# Altium PCB BoostCon_Control_Board_PCB.PcbDoc
Units mil, origin at the board's own origin, x right, y up, seen from the top; angles counter-clockwise.
Board outline 4715 x 2475 mil, 2 copper layers (Top Layer, Bottom Layer); 62 components, 47 nets, 232 pads, 12 vias.
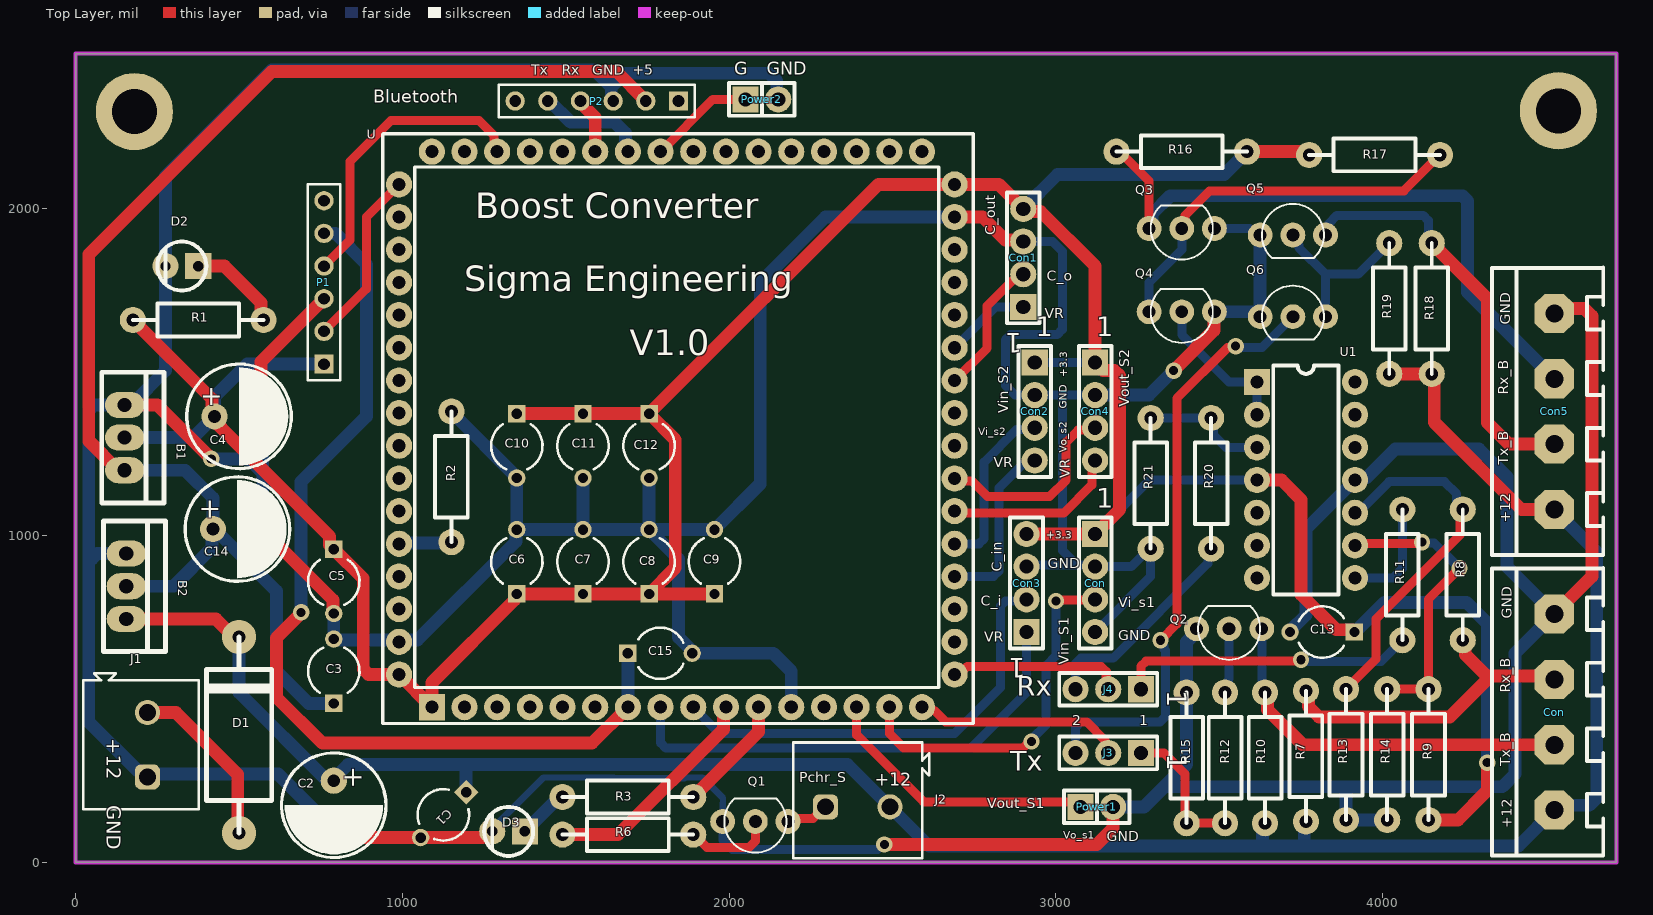
[diagram p0: Top Layer view]
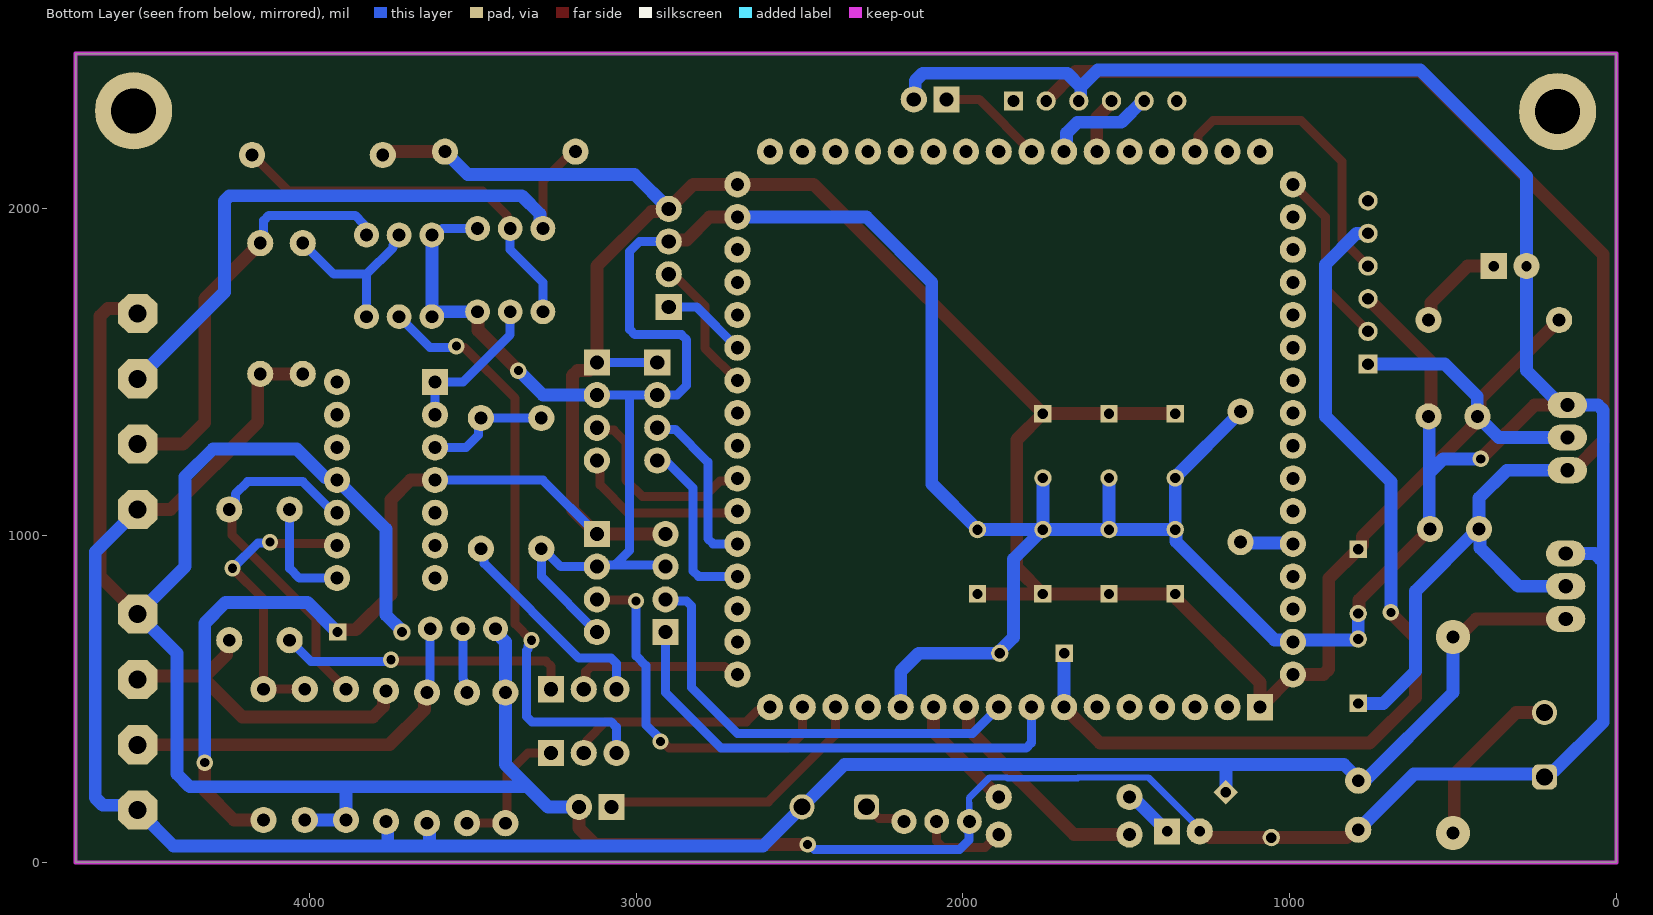
[diagram p1: Bottom Layer view, seen from below]

## Layer stack, top to bottom
Top Solder: solder mask 0.4, Solder Resist, Dk 3.5
Top Layer: signal copper 1.4
Dielectric 1: dielectric 12.6, FR-4, Dk 4.8
Bottom Layer: signal copper 1.4
Bottom Solder: solder mask 0.4, Solder Resist, Dk 3.5

## Board outline
0,0 4715,0 4715,2475 0,2475

## Design rules (kind name [scope] priority, off if disabled: settings)
Clearance [All] p1: gap=10 ignorepadtopadclearanceinfootprint=FALSE except(0: Arc-Hole Track-Hole SMDPad-Hole THPad-Hole Via-Hole Fill-Hole Poly-Hole Region-Hole Text-Hole)
HoleSize [All] p1: absolutevalues=TRUE maxlimit=393.7 minlimit=1 maxpercent=80.000 minpercent=20.000
PolygonConnect [All] p1: connectstyle=Relief reliefconductorwidth=10 reliefentries=4 polygonreliefangle="90 Angle" airgapwidth=10
RoutingVias [All] p1: holewidth=28 width=50 viastyle="Through Hole" minholewidth=28 minwidth=50 maxholewidth=28 maxwidth=50
SilkToSilkClearance [All] p1: silktosilkclearance=0
SilkToSolderMaskClearance [IsPad] p1: minsilkscreentomaskgap=0 clearancetoexposedcopper=TRUE
SolderMaskExpansion [All] p1: expansion=4 istentingtop=FALSE
Width [All] p1: maxlimit=39.37 minlimit=19.68 preferedwidth=27.56
27 further rules are at their usual default settings.

## Components (designator, comment, footprint, x,y, rotation, side; value= is the part's Value field where it differs from the comment)
B1 "AMS1117" 78MXX2 150,1400 r270 top
B2 "AMS1117" 78MXX2 155,945 r270 top
C1 "Cap2" CAPR5-4X5 1125.4,145.4 r225 top value=100nF
C2 "CAP_p" CAP-1.5 790,250 r270 top value=100uf
C3 "Cap2" CAPR5-4X5 790,585 r90 top value=100nF
C4 "CAP_p" CAP-1.5 425,1365 r0 top value=100uf
C5 "Cap2" CAPR5-4X5 790,860 r270 top value=100nF
C6 "Cap2" CAPR5-4X5 1350,920 r90 top value=100nF
C7 "Cap2" CAPR5-4X5 1552.5,920 r90 top value=100nF
C8 "Cap2" CAPR5-4X5 1755,920 r90 top value=100nF
C9 "Cap2" CAPR5-4X5 1955,920 r90 top value=100nF
C10 "Cap2" CAPR5-4X5 1350,1275 r270 top value=100nF
C11 "Cap2" CAPR5-4X5 1552.5,1275 r270 top value=100nF
C12 "Cap2" CAPR5-4X5 1755,1275 r270 top value=100nF
C13 "Cap2" CAPR5-4X5 3815,705 r180 top value=100nF
C14 "CAP_p" CAP-1.5 420,1020 r0 top value=100uf
C15 "Cap2" CAPR5-4X5 1788.43,640 r0 top value=100nF
Con "CON4" TB4 4525,160 r90 top
Con "CON4" SIP4 3120,1005 r270 top
Con1 "CON4" SIP4 2900,1700 r90 top
Con2 "CON4" SIP4 2935,1530 r270 top
Con3 "CON4" SIP4 2910,705 r90 top
Con4 "CON4" SIP4 3120,1530 r270 top
Con5 "CON4" TB4 4525,1080 r90 top
D1 "Diode" DO-201AD 500,90 r90 top
D2 "LED_Red" LED3 375,1825 r180 top
D3 "LED_Red" LED3 1375,95 r180 top
J1 "691111710002" 691134710002 200,360 r90 top
J2 "691111710002" 691134710002 2393.43,189.69 r0 top
J3 "C_AUX" SIP3 3260,335 r180 top
J4 "C_AUX" SIP3 3260,530 r180 top
P1 "Header 6" HDR1X6 760,1525 r90 top
P2 "Header 6" HDR1X6 1845,2330 r180 top
Power1 "Plugable_2Pin" SIP2 3075,170 r0 top
Power2 "Plugable_2Pin" SIP2 2050,2335 r0 top
Q1 "BC517" TO92-bc517 2080,125 r180 top
Q2 "BC517" TO92-bc517 3530,715 r180 top
Q3 "2N7000" TO92 3385,1940 r180 top
Q4 "2N7000" TO92 3385,1685 r180 top
Q5 "2N7000" TO92 3725,1920 r0 top
Q6 "2N7000" TO92 3725,1670 r0 top
R1 "RES_s" R3 175,1660 r0 top
R2 "RES_s" R3 1150,980 r90 top
R3 "RES_s" R3 1890,200 r180 top
R6 "RES_s" R3 1490,85 r0 top
R7 "RES_s" R3 3765,125 r90 top
R8 "RES_s" R3 4245,1080 r270 top
R9 "RES_s" R3 4140,530 r270 top
R10 "RES_s" R3 3640,520 r270 top
R11 "RES_s" R3 4060,1080 r270 top
R12 "RES_s" R3 3517.5,120 r90 top
R13 "RES_s" R3 3887.5,130 r90 top
R14 "RES_s" R3 4013.75,130 r90 top
R15 "RES_s" R3 3400,120 r90 top
R16 "RES_s" R3 3185,2175 r0 top
R17 "RES_s" R3 4175,2165 r180 top
R18 "RES_s" R3 4150,1895 r270 top
R19 "RES_s" R3 4020,1895 r270 top
R20 "RES_s" R3 3475,960 r90 top
R21 "RES_s" R3 3290,960 r90 top
U "STM32F030R8T6" "LQFP64_M - CONVERTER" 1840,1325 r90 top
U1 "MCP6004" DIP14 3615,1470 r0 top

## Footprints (in the part's own frame and the unit in brackets; to place one, negate y for a bottom-side part, rotate by r counter-clockwise, add the part's x,y. Pads: shape width x height; smd on the part's side, far side on the other; paste and mask are expansions set on the pad)
78MXX2 [mil]
  oval 80x120 hole 43.31: 1(0,0) 2(100,0) 3(200,0)
  silkscreen extent -100,-70 300,120, body extent -109,-70 311,115, height 738
691134710002 [mm] "Serie 1347 - 5.00 mm_2 pins"
  rrect50% 1.95x1.95 hole 1.3: 1(-2.5,-0.5)
  round 1.95 hole 1.3: 2(2.5,-0.5)
  silkscreen extent -5,-4.5 5.55,4.5, body extent -5,-4.5 5.55,4.5, height 13.1
CAP-1.5 [mil]
  round 80 hole 39.37: 1(0,0) 2(150,0)
  silkscreen extent -85,-160 235,160, body extent -93,-167 241,167, height 551
CAPR5-4X5 [mm] "Capacitor; 2 Leads"
  rect 1.35x1.35 hole 0.8: 1(-2.5,0)
  round 1.35 hole 0.8: 2(2.5,0)
  silkscreen extent -1.69,-2 1.82,2
DIP14 [mil]
  rect 80x80 hole 40: 1(0,0)
  round 80 hole 40: 2(0,-100) 3(0,-200) 4(0,-300) 5(0,-400) 6(0,-500) 7(0,-600) 8(300,-600) 9(300,-500) 10(300,-400) 11(300,-300) 12(300,-200) 13(300,-100) 14(300,0)
  silkscreen extent 50,-650 250,50, body extent 1,-674 311,76, height 210
DO-201AD [mil]
  round 105 hole 40: A(0,0) K(600,0)
  silkscreen extent 0,-100 600,100, body extent -26,-110 626,110, height 220
HDR1X6 [mm] "Connector; Header; 6 Position"
  rect 1.5x1.5 hole 0.9: 1(0,0)
  round 1.5 hole 0.9: 2(2.54,0) 3(5.08,0) 4(7.62,0) 5(10.16,0) 6(12.7,0)
  silkscreen extent -1.27,-1.27 13.97,1.27
LED3 [mil]
  rect 80x80 hole 32: A(0,0)
  round 80 hole 32: K(100,0)
  silkscreen extent -25,-75 125,75, body extent -26,-76 110,76, height 209
"LQFP64_M - CONVERTER" [mil] "Arm_Converter"
  rect 80x80 hole 40: 1(-850,750)
  round 80 hole 40: 2(-850,650) 3(-850,550) 4(-850,450) 5(-850,350) 6(-850,250) 7(-850,150) 8(-850,50) 9(-850,-50) 10(-850,-150) 11(-850,-250) 12(-850,-350) 13(-850,-450) 14(-850,-550) 15(-850,-650) 16(-850,-750) 17(-750,-850) 18(-650,-850) 19(-550,-850) 20(-450,-850) 21(-350,-850) 22(-250,-850) 23(-150,-850) 24(-50,-850) 25(50,-850) 26(150,-850) 27(250,-850) 28(350,-850) 29(450,-850) 30(550,-850) 31(650,-850) 32(750,-850) 33(850,-750) 34(850,-650) 35(850,-550) 36(850,-450) 37(850,-350) 38(850,-250) 39(850,-150) 40(850,-50) 41(850,50) 42(850,150) 43(850,250) 44(850,350) 45(850,450) 46(850,550) 47(850,650) 48(850,750) 49(750,850) 50(650,850) 51(550,850) 52(450,850) 53(350,850) 54(250,850) 55(150,850) 56(50,850) 57(-50,850) 58(-150,850) 59(-250,850) 60(-350,850) 61(-450,850) 62(-550,850) 63(-650,850) 64(-750,850)
  silkscreen extent -900,-907 905,900, body extent -895,-905 905,905, height 334
R3 [mil]
  round 80 hole 39.37: 1(0,0) 2(400,0)
  silkscreen extent 0,-50 400,50, body extent -11,-50 411,52, height 185
SIP2 [mil]
  rect 80x80 hole 43.31: 1(0,0)
  round 80 hole 43.31: 2(100,0)
  silkscreen extent -50,-50 150,50, body extent -50,-45 150,55, height 334
SIP3 [mil]
  rect 80x80 hole 43.31: 1(0,0)
  round 80 hole 43.31: 2(100,0) 3(200,0)
  silkscreen extent -50,-50 250,50, body extent -50,-45 250,55, height 334
SIP4 [mil]
  rect 80x80 hole 43.31: 1(0,0)
  round 80 hole 43.31: 2(100,0) 3(200,0) 4(300,0)
  silkscreen extent -50,-50 350,50, body extent -50,-45 350,55, height 334
TB4 [mil] "Terminal Block Straight"
  oct 120x120 hole 55.12: 1(0,0) 2(200,0) 3(400,0) 4(600,0)
  silkscreen extent -139,-150 740,191, body extent -132,-397 734,75, height 337
TO92 [mil]
  round 76 hole 39.37: 1(100,0) 2(0,0) 3(-100,0)
  silkscreen extent -95,-70 95,95, body extent -95,-52 95,93, height 210
TO92-bc517 [mil]
  round 76 hole 39.37: 1(-100,0) 2(0,0) 3(100,0)
  silkscreen extent -95,-70 95,95, body extent -95,-52 95,93, height 210

## Part data
B1 B2: "1117", Manufacturer_Name="Advanced Monolithic Systems", Datasheet Link=https://datasheet.lcsc.com/szlcsc/Advanced-Monolithic-Systems-AMS-AMS1117-ADJ_C6188.pdf, Geometry.Height=1.8mm, Manufacturer_Part_Number=AMS1117
C1 C3 C5 C6 C7 C8 C9 C10 C11 C12 C13 C15: "Capacitor", PackageDescription="Capacitor; 2 Leads", PackageReference=CAPR5-4X5, Published=23-Sep-2002, Publisher="Altium Limited"
C2 C4 C14: library part CAP-DC
Con Con Con1 Con2 Con3 Con4 Con5: "4Pin_pinHeader", DPM/VM/AM="DPM, VM, AM", SMD/TH=TH
D2 D3: library part LED, "Led_Red_1206", DPM/VM/AM="DPM, VM, AM", SMD/TH=SMD
J1 J2: "WR-TBL Series 111 Horizontal Entry Modular, THT, pitch 5mm, 2p", Manufacturer="Wurth Elektronik", Operating Temperature Max=105°C, Operating Temperature Min=-40°C, Rated Current=15A, Working Voltage=250V, Application="Pressure Clamp", Category="Terminal Blocks", ComponentLink1Description="Website Link", ComponentLink1URL=https://www.we-online.com/redexpert/article/691111710002?ad, ComponentLink2Description="Datasheet Link", ComponentLink2URL=https://www.we-online.com/redexpert/spec/691111710002?ad, Manufacturer Part Number=691111710002, Match Code=WR-TBL, Modularity=Yes, Mount="Through Hole", Number of Pins=2, Number of Rows=1, Orientation=Horizontal, Packaging=Box, Pitch=5mm
J3 J4: library part CON3, "Connector", Note=SC, SMD/TH=TH
P1 P2: "Header, 6-Pin", LatestRevisionDate=17-Jul-2002, LatestRevisionNote="Re-released for DXP Platform.", Publisher="Altium Limited"
Power1 Power2: library part CON2, "Connector", SMD/TH=TH
Q1 Q2: "Bipolar _BJT_ Transistor NPN - Darlington 30V 1A 200MHz 625mW Through Hole TO-92-3", Package="TO-92 NXP Semiconductors", Availability=Unavailable, MF=ON, MP=BC517, Price=None, SnapEDA_Link=https://www.snapeda.com/parts/BC517/ON%20Semiconductor/view-part/703680/?ref=snap
Q3 Q4 Q5 Q6: "N-Channel 60 V 350mA (Tc) 1W (Tc) Through Hole TO-92-3", Package="E-PKG AXIAL-LEADED-2 ON Semiconductor", Check_prices=https://www.snapeda.com/parts/2N7000/STMicroelectronics/view-part/?ref=eda, MF=STMicroelectronics, MP=2N7000, SnapEDA_Link=https://www.snapeda.com/parts/2N7000/STMicroelectronics/view-part/?ref=snap
R1 R2 R3 R6 R7 R8 R9 R10 R11 R12 R13 R14 R15 R16 R17 R18 R19 R20 R21: library part RES
U: "ARMÂ® CortexÂ®-M0 STM32F0 Microcontroller IC 32-Bit 48MHz 64KB _64K x 8_ FLASH", Package="LQFP-64 STMicroelectronics", Availability=Unavailable, MF=STMicroelectronics, MP=STM32F030R8T6, Price=None, SnapEDA_Link=https://www.snapeda.com/parts/STM32F030R8T6/STMicroelectronics/view-part/312109/?ref=snap
U1: "Low Power Quad Operational Amplifier", Note=SC, SMD/TH=SMD
D1: SMD/TH=SMD

## Free pads (board coordinates)
  round 236.22 hole 137.8: 2(180,2297.83) 2(4537.83,2300)

## Via types
v1: diameter 50, hole 28, Top Layer to Bottom Layer, 12 vias

## Nets (pads, with @x,y where several pads share a name; then routed paths per layer and width w, separated by ;. In a path a pad name is that pad's centre, name@x,y a point inside that pad or via, vN(x,y) a via of type N, cw(c..) or ccw(c..) an arc to the next point about the centre after c; other vN are vias at no path point)
+3.3: B1.2 C4.1 C5.1 C6.1 C7.1 C8.1 C9.1 C10.1 C11.1 C12.1 C13.1 Con1.4 Con2.1 Con3.4 Con4.1 Con.1@3120,1005 P1.1 R1.1 R9.2 R16.2 R17.2 U1.4 U.1 U.32 U.64 | length 10851
  Top Layer w39.37: R1.1 417.23,1417.77 417.23,1372.77 C4.1 425,1350.81 447.46,1328.35 447.46,1327.54 777.2,997.8 777.2,971.22 C5.1 880,868.43 880,591.14 896.14,575 U.64 U.1 1090.99,475.99 1090.99,550.99 1343.11,803.11 1343.11,814.69 C6.1 C7.1 C8.1 ; C10.1 C11.1 C12.1 ; C9.1 C8.1 ; Con3.4@2935,1005 3120,1005 3195,1080 3195,1489.37 3178.86,1505.51 3144.49,1505.51 Con4.1 3120,1825 2952.77,1992.23 2907.77,1992.23 Con1.4 2825,2075 U.32 2456.57,2075 C12.1 ; R16.2 3754.01,2175 3764.01,2165 R17.2 ; U1.4 3690,1170 3750,1110 3750,820 3858.11,711.89 3894.43,711.89 3906.54,711.89 C13.1 ; R9.2 4230,130 4320,220 v1(4320,305.31) ; C8.1 1835,901.58 1835,1293.43 C12.1
  Bottom Layer w27.56: Con2.1 Con4.1 ; Con.1@3120,1005 3285,1170 U1.4
  Bottom Layer w39.37: B1.2 360,1300 C4.1 425.67,1365.67 425.67,1425.67 525,1525 P1.1 ; Con1.4 3005,2105 3515,2105 R16.2 ; C13.1@3911.13,701.13 3911.13,702.7 C13.1 3920.31,711.89 3921.89,711.89 4005,795 4256.94,795 4320,731.94 v1(4320,305.31)
+5: B1.3 B2.2 C3.1 C14.1 P2.2 | length 4195.9
  Top Layer w39.37: B1.3 130,1200 40,1290 40,1860 600,2420 1655,2420 P2.2
  Bottom Layer w39.37: B1.3 335,1200 420,1115 C14.1 ; B2.2 300,845 417.54,962.54 417.54,1017.54 C14.1 ; C3.1 713.43,486.57 615,585 615,830 425,1020 C14.1
+12: B2.3 C1.1 C2.1 Con5.1 Con.1@4525,160 D1.K J2.2 R7.1 R10.2 R18.2 R19.2 | length 6909.7
  Top Layer w39.37: B2.3 429.04,745 484.04,690 D1.K@505,690 ; R19.2 R18.2 4157.77,1487.23 4157.77,1347.23 4425,1080 Con5.1
  Bottom Layer w39.37: D1.K 500,520 C2.1@770,250 ; C2.1 790,255.99 833.38,299.37 1200,299.37 ; C1.1 1195,294.37 1200,299.37 ; R10.2 3632.23,112.23 3632.23,52.54 3630,50.31 ; R7.1 3760,120 3760,50.31 ; Con5.1 4655,950 4655,198.06 4631.94,175 4540,175 4525,160 4415.31,50.31 3760,50.31 ; 1200,299.37 2362.48,299.37 2611.54,50.31 3630,50.31 ; 3630,50.31 3760,50.31
Boot0: R2.1 U.60 | length 162.1
  Bottom Layer w39.37: U.60 992.5,977.5 1147.5,977.5 R2.1
C_S_in: Con1.2 U.26 | length 420
  Top Layer w27.56: U.26 2789.14,1574.14 2789.14,1702.77 2886.37,1800 Con1.2
C_S_out: Con3.2 U.9 | length 1366.7
  Bottom Layer w27.56: U.9 1970,395 2690,395 2830,535 2830,783.9 2846.14,800.04 Con3.2@2910,800.04
FLASH: R3.1 U.11 | length 357.8
  Top Layer w39.37: R3.1 2090,400 U.11
GND: B1.1 B2.1 C1.2 C2.2 C3.2 C4.2 C5.2 C6.2 C7.2 C8.2 C9.2 C10.2 C11.2 C12.2 C13.2 C14.2 C15.2 Con1.3 Con2.2 Con3.3 Con4.2 Con5.4 Con.2@3120,905 Con.4 D2.K D3.K J1.1 P1.3 P2.3 Power1.2 Power2.2 Q1.3 Q2.3 Q3.3 Q4.3 Q5.3 Q6.3 R2.2 R13.1 R14.1 R15.2 R21.1 U1.11 U.12 U.31 U.63 | length 22731.8
  Top Layer w39.37: B1.1@125,1400 B1.1 250,1400 v1(415,1235) ; C14.2 787.36,802.64 787.36,764.21 C5.2 ; C4.2 567.23,1372.77 567.23,1532.23 P1.3 ; C2.2 800.99,100 825.19,75.81 C1.2 1244.81,75.81 1264.01,95 D3.K ; v1(2475,55) 3125,55 3175,105 Power1.2 ; U.31 2775,1975 2845.04,1904.96 2895.04,1904.96 Con1.3 ; v1@3362.03,1507.03 3483.24,1628.24 3483.24,1683.24 Q4.3 ; Con.4@4525,760 4640,875 4640,1671.94 4616.94,1695 4540,1695 Con5.4
  Bottom Layer w19.68: D3.K@1296.94,125 1431.78,259.84 1646.64,259.84 1648.5,257.98 1863.35,257.98 1865.21,259.84 1918.27,259.84 1981.07,197.04 1981.07,180.74 1980.73,180.4 1980.73,125.73 Q1.3 1981.04,123.96 1990.78,114.22 Q1.3@1990.78,96.21
  Bottom Layer w27.56: C14.2 C14.2@572.5,1022.5 ; C4.2@572.5,1362.5 C4.2 ; D3.K@1250.71,105.1 1260.81,95 D3.K ; Q1.3@1981.04,123.96 1981.04,68.96 2010,40 2453.93,40 2468.93,55 v1(2475,55) ; Con1.3 2990,1900 3020,1870 3020,1631.14 3003.86,1615 2861.14,1615 2845,1598.86 2845,1460 2875,1430 Con2.2 3020,1430 ; Con3.3 2914.96,909.96 Con.2@3115.04,909.96 ; 3062.29,912.71 3020,955 3020,1430 ; Con.2@3116.99,908.01 3120,905 3229.97,905 3284.97,960 R21.1 3290,875 Con.4@3120,705 ; Con4.2 3020,1430 ; Q3.3 3591.89,1940 3611.89,1920 Q5.3
  Bottom Layer w39.37: B2.1 66.14,945 50,928.86 40,938.86 ; v1(415,1235) 530,1235 572.5,1192.5 ; C14.2@572.5,1022.5 572.5,1192.5 ; C4.2@572.5,1362.5 572.5,1192.5 ; C2.2 620,270 228.11,270 J1.1 200.98,280.28 189.72,280.28 40,430 40,938.86 ; C5.2 C3.2 792.64,680.79 984.21,680.79 U.63 995.67,680.67 1045.67,680.67 1347.36,982.36 1347.36,1015.79 C6.2 ; R2.2 1150,1378.29 1350,1178.29 C10.2 C6.2 ; D3.K D3.K@1275,105.99 ; C11.2 C7.2 ; P2.3 1638.97,2336.03 1638.97,2373.19 ; C12.2 C8.2 ; Power2.2 2145.59,2339.41 2145.59,2391.94 2122.53,2415 1680.78,2415 1638.97,2373.19 ; U.12 2190,585 2135,640 C15.2 1886.85,643.73 1879.96,650.62 1879.96,653.81 1845,688.77 1845,928.43 C8.2 ; U.31 2295,1975 2095,1775 2095,1158.43 C9.2 C8.2 ; Con4.2 3285,1430 v1(3360,1505) ; Power1.2 3270,170 3331.36,231.36 ; Q2.3 3430,705.09 3400,675.09 R15.2 3400,300 3331.36,231.36 ; Q4.3 3600.09,1685 3615.09,1670 Q6.3 Q5.3 ; C13.2 3716.57,708.73 3765,757.15 3765,1020 U1.11 3922.77,1177.77 3951.15,1177.77 4038.38,1265 4295,1265 4380,1180 4380,905 4525,760 4405,640 4405,270.56 4368.58,234.14 ; 3887.5,227.42 R13.1 R14.1 ; 4365.79,231.36 3331.36,231.36 ; 40,938.86 40,1383.86 56.14,1400 B1.1 170,1400 275,1505 D2.K 275,2100 600,2425 1587.16,2425 1638.97,2373.19 ; C6.2 C7.2 ; C7.2 C8.2
NetD1_A: D1.A J1.2 | length 537.5
  Top Layer w39.37: J1.2 306.57,458.43 496.21,268.79 496.21,98.79 D1.A@505,90
NetD2_A: D2.A R1.2 | length 294.7
  Top Layer w39.37: D2.A 455,1825 567.23,1712.77 567.23,1667.77 R1.2
NetD3_A: D3.A R3.2 | length 172.6
  Bottom Layer w39.37: D3.A@1380,90 D3.A 1480,200 R3.2 R3.2@1485,195
NetQ1_2: Q1.2 R6.2 | length 274.9
  Top Layer w27.56: R6.2 1892.36,85 1932.36,45 2060,45 2080,65 Q1.2
NetQ2_2: Q2.2 R12.2 | length 200.2
  Bottom Layer w27.56: R12.2 3527.53,530.03 3527.53,559.9 3530,562.36 Q2.2
NetQ3_2: Q3.2 Q4.1 R17.1 | length 1197.2
  Top Layer w27.56: Q3.2 3394.27,1949.27 3394.27,1979.27 3470,2055 4065,2055 R17.1
  Bottom Layer w27.56: Q4.1 3285,1775 3385,1875 Q3.2
NetQ4_2: Q4.2 U1.1 U1.2 | length 460.1
  Bottom Layer w27.56: Q4.2 3385,1615 3530,1470 U1.1 U1.2
NetQ5_2: Q5.2 Q6.1 R19.1 | length 525.8
  Bottom Layer w27.56: Q5.2 3725,1906.89 3743.54,1888.35 3743.54,1881.46 3825,1800 ; Q6.1 3825,1800 ; R19.1 3925,1800 3825,1800
NetR8_1: R8.1 R13.2 U1.10 | length 1112.4
  Top Layer w27.56: R13.2 3980,622.5 3980,745 4236.25,1001.25 R8.1@4236.25,1080
  Bottom Layer w27.56: U1.10 3925,1070 4020,1165 4189.05,1165 4226.22,1127.83 4226.22,1090.03 R8.1@4236.25,1080
NetR9_1: R9.1 R14.2 U1.9 | length 892.9
  Top Layer w27.56: U1.9 3920.71,975.71 4115.71,975.71 v1(4120,980) ; R14.2 R9.1 4140,805 v1(4235,900)
  Bottom Layer w27.56: v1(4120,980) 4121.85,978.15 4156.85,978.15 v1(4235,900)
NetR11_1: R11.1 U1.8 | length 346.5
  Bottom Layer w27.56: U1.8 4030,870 4060,900 R11.1@4060,1089.07
NetR20_2: R20.2 R21.2 U1.3 | length 388.6
  Bottom Layer w27.56: R21.2 R20.2 3482.46,1352.54 3482.46,1307.54 3520,1270 U1.3
NRST: C15.1 P1.5 U.7 | length 2951.8
  Top Layer w39.37: v1(690,765) 690,762.12 615,687.12 615,505 755,365 1580,365 U.7
  Bottom Layer w39.37: v1(690,765) 690,1165 890,1365 890,1830 795,1925 P1.5 ; U.7 C15.1
PreChgRelay: R6.1 U.10 | length 696.7
  Top Layer w39.37: R6.1 1660,85 1982.23,407.23 1982.23,467.23 U.10
PreChgRelay_signal: J2.1 Q1.1 | length 154.1
  Top Layer w27.56: Q1.1 2189.27,134.27 2256.34,134.27 2292.07,170 J2.1 J2.1@2282.64,182.36
  Bottom Layer w27.56: J2.1@2292.07,170 J2.1
PWM_G: Power2.1 U.41 | length 326.3
  Top Layer w27.56: U.41 1950,2335 Power2.1
RX1: P2.4 U.43 | length 173.6
  Top Layer w39.37: P2.4 1545,2324.67 1590,2279.67 U.43
RX2_HV1: J4.1 R11.2 | length 916.4
  Top Layer w27.56: J4.1 3260,600.08 3276.14,616.22 3746.22,616.22 v1(3750,620)
  Bottom Layer w27.56: v1(3750,620) 3755,615 3995,615 R11.2@4066.44,686.44
RX2_HV2: J4.3 R20.1 | length 659.8
  Bottom Layer w27.56: J4.3 3060,608.86 3076.14,625 3175,625 3464.97,914.97 3464.97,949.97 R20.1
RX2_LV: J4.2 U.17 | length 537.4
  Top Layer w27.56: U.17 2704.19,575 2729.19,600 3137.8,600 3153.94,583.86 3153.94,536.06 J4.2
RX_BUS2: Con5.3 Q3.1 R16.1 | length 1979.5
  Top Layer w27.56: R16.1 3195,2175 3285,2085 Q3.1
  Bottom Layer w39.37: Q3.1 3294.27,1949.27 3294.27,1984.27 3350,2040 4243.86,2040 4260,2023.86 4260,1745 Con5.3
SWCLK: P1.2 U.49 | length 545.3
  Top Layer w27.56: P1.2 890,1755 890,1975 U.49
SWDIO: P1.4 U.46 | length 917.7
  Top Layer w27.56: P1.4 840,1905 840,2145 965,2270 1235,2270 1280.04,2224.96 1280.04,2184.96 U.46
SWO: P1.6
TX1: P2.5 U.42 | length 343
  Top Layer w27.56: P2.5@1445,2325 P2.5
  Bottom Layer w39.37: P2.5 1450.33,2330 1515.33,2265 1649.16,2265 1682.23,2231.94 1682.23,2182.77 U.42
TX2_HV1: J3.1 R12.1 R15.1 | length 429.4
  Top Layer w27.56: J3.1 3330,335 3395,270 R15.1@3395,120 ; R15.1 R12.1
TX2_HV2: J3.3 Q6.2 | length 1830.6
  Top Layer w27.56: v1(3320,680) 3370,730 3370,1420 3525.71,1575.71 3545.71,1575.71 v1(3550,1580)
  Bottom Layer w27.56: J3.3 3060,413.86 3076.14,430 3318.86,430 3335,446.14 3335,649.13 3331.22,652.91 3331.22,662.71 3320,673.93 v1(3320,680) ; v1(3550,1580) 3554.29,1575.71 3601.97,1575.71 3602.56,1575.12 3630.12,1575.12 Q6.2
TX2_LV: J3.2 U.16 | length 644.7
  Top Layer w27.56: U.16 2600.03,464.97 2627.4,464.97 2662.36,430 3093.58,430 3149.97,373.62 3149.97,345.03 J3.2
TX_BUS1: Con.2@4525,360 Q2.1 R10.1 | length 1176.8
  Top Layer w39.37: R10.1 3647.77,512.23 3647.77,467.23 3755,360 Con.2@4525,360
  Bottom Layer w27.56: Q2.1 3630,530 R10.1
TX_BUS2: Con5.2 Q5.1 R18.1 | length 1285.7
  Top Layer w39.37: R18.1 4320,1725 4320,1346.47 4386.47,1280 Con5.2
  Bottom Layer w27.56: Q5.1 3834.27,1929.27 3834.27,1954.27 3860,1980 4123.86,1980 4140,1963.86 4140,1905 R18.1
Vin_S_1: Con.3@3120,805 U.15 | length 1145.4
  Top Layer w27.56: U.15 2490,395 2535,350 2898.93,350 2918.93,370 v1(2925,370) ; v1(3000,800) 3002.5,802.5 3102.43,802.5 3109.97,794.97 3120,805 Con.3@3130,795
  Bottom Layer w27.56: v1(2925,370) 2925,376.07 2970,421.07 2970,601.97 3000,631.97 v1(3000,800)
Vin_S_2: Con2.3 U.21 | length 529
  Bottom Layer w27.56: U.21 2763.86,975 2780,991.14 2780,1225 2880.04,1325.04 2930.04,1325.04 Con2.3
Vout_S_1: Power1.1 U.14 | length 861.1
  Top Layer w27.56: U.14 2390,390 2595,185 3060,185 Power1.1
Vout_S_2: Con4.3 U.23 | length 607.7
  Top Layer w27.56: U.23 2697.46,1167.54 2742.46,1167.54 2790,1120 2980.95,1120 3031.05,1170.1 3031.05,1286.05 3067.54,1322.54 3112.54,1322.54 Con4.3
VR_C_in: Con1.1 U.27 | length 261.8
  Bottom Layer w27.56: U.27 2815,1700 Con1.1
VR_C_out: Con3.1 U.8 | length 1491
  Bottom Layer w27.56: U.8 1790,366.14 1806.14,350 2740,350 2910,520 Con3.1
VR_vi: Con2.4 U.20 | length 540.8
  Bottom Layer w27.56: U.20 2808.86,875 2825,891.14 2825,1145 2899.97,1219.97 2924.97,1219.97 Con2.4
VR_Vo: Con4.4 U.22 | length 537.4
  Top Layer w27.56: U.22 2696.22,1068.78 3023.78,1068.78 3109.97,1154.97 3109.97,1219.97 Con4.4
RX_BUS1: Con.3@4525,560 R7.2 R8.2 | length 1024.4
  Top Layer w39.37: R7.2 3772.77,517.23 3772.77,477.23 3805.04,444.96 4204.96,444.96 4329.96,569.96 ; R8.2@4244.02,680 4252.77,671.25 4252.77,636.42 4319.23,569.96 4515.04,569.96 Con.3@4525,560
pads on no net: P2.1 P2.6 U1.5 U1.6 U1.7 U1.12 U1.13 U1.14 U.2 U.3 U.4 U.5 U.6 U.13 U.18 U.19 U.24 U.25 U.28 U.29 U.30 U.33 U.34 U.35 U.36 U.37 U.38 U.39 U.40 U.44 U.45 U.47 U.48 U.50 U.51 U.52 U.53 U.54 U.55 U.56 U.57 U.58 U.59 U.61 U.62

## Keep-outs
Keep-Out Layer:
  the board outline again, w11.81

## Silkscreen, mask and mechanical layers (free items; w line width, h text height)
Top Overlay:
  text "Tx" at 1395,2410 h31.5
  text "Rx" at 1487.84,2410 h31.5
  text "GND" at 1580.68,2410 h31.5
  text "+5" at 1705,2410 h31.5
  text "G" at 2015,2410 h39.37
  text "GND" at 2115,2410 h39.37
  text "Bluetooth" at 910,2325 h39.37
  text "Boost Converter" at 1222.71,1971.56 h78.74
  text "C_out" at 2814.75,1920 h31.5 r90
  text "C_o" at 2971.87,1780.01 h31.5
  text "Sigma Engineering" at 1189.91,1748.47 h78.74
  text "VR" at 2965,1665 h31.5
  text "GND" at 4390,1645 h31.5 r90
  text "V1.0" at 1695,1551.62 h78.74
  text "+3.3" at 3035,1485 h23.62 r90
  text "Rx_B" at 4384.75,1431.09 h31.5 r90
  text "Vout_S2" at 3224.75,1395 h31.5 r90
  text "GND" at 3032.87,1387.87 h23.62 r90
  text "Vin_S2" at 2854.75,1375 h31.5 r90
  text "Vi_s2" at 2762.87,1306.81 h23.62
  text "Vo_s2" at 3032.87,1252.87 h23.62 r90
  text "Tx_B" at 4384.75,1217.18 h31.5 r90
  text "VR" at 2810,1210 h31.5
  text "VR" at 3042.87,1175 h31.5 r90
  text "+12" at 4390,1040 h31.5 r90
  text "+3.3" at 2970,990 h23.62
  text "GND" at 2975,900 h31.5
  text "C_in" at 2834.75,890 h31.5 r90
  text "C_i" at 2770,785.25 h31.5
  text "Vi_s1" at 3190,780.25 h31.5
  text "GND" at 4395,745 h31.5 r90
  text "GND" at 3190,680 h31.5
  text "VR" at 2780,675 h31.5
  text "Vin_S1" at 3039.75,605 h31.5 r90
  text "Rx_B" at 4389.75,519.42 h31.5 r90
  text "Rx" at 2880,510 h60
  text "2" at 3050,420 h31.5
  text "1" at 3255,420 h31.5
  text "+12" at 80,380 h74.8 r270
  text "Tx_B" at 4389.75,293.84 h31.5 r90
  text "Tx" at 2860,280 h60
  text "Pchr_S" at 2215,245.25 h31.5
  text "+12" at 2445,235 h39.37
  text "GND" at 79.66,175 h74.8 r270
  text "Vout_S1" at 2790,165.25 h31.5
  text "+12" at 4395,105 h31.5 r90
  text "Vo_s1" at 3022.87,72.13 h23.62
  text "GND" at 3155,65 h31.5

## Text inside footprints (layer, text, board x,y; h text height)
C2: Top Overlay "+" at 824,294 h60 r270; Mechanical 29 "+" at 824,294 h60 r270
C4: Top Overlay "+" at 381,1399 h60; Mechanical 29 "+" at 381,1399 h60
C14: Top Overlay "+" at 376,1054 h60; Mechanical 29 "+" at 376,1054 h60
Con: Top Overlay "1" at 3123,1085 h60
Con1: Top Overlay "1" at 2897,1620 h60 r180
Con2: Top Overlay "1" at 2938,1610 h60
Con3: Top Overlay "1" at 2907,625 h60 r180
Con4: Top Overlay "1" at 3123,1610 h60
J3: Top Overlay "1" at 3340,332 h60 r270
J4: Top Overlay "1" at 3340,527 h60 r270